# EAGLE board TinkerCAD Design-D4 (EAGLE 9.7.0)

Size 296.07 x 301.46 mm. Coordinates in mm from the lower left corner, seen from the top.
Outline: 0,0 296.07,0 296.07,301.46 0,301.46 0,0
Copper layers (1*16): Top 0.035mm / dielectric 1.5mm / Bottom 0.035mm
Design rules "default": minimum track width 6mil, minimum drill 0.35mm, track to track 6mil, track to pad 6mil, pad to pad 6mil, via to via 6mil, smd to smd 6mil, copper to edge 40mil, drill to drill 6mil, minimum pad ring 10mil, minimum via ring 8mil, stop-mask expansion 4mil, vias tented up to drill 0mil, thermal gap 10mil

## Footprints (pad centres in the part's own frame; a part is rotated, then mirrored left to right if it is on the bottom)
HC-SR04 = drill 1.016 long: 1 -3.81,0; 2 -1.27,0; 3 1.27,0; 4 3.81,0
DG01D = drill 1.118 pad 3.15 octagon: + 2.54,0; - -2.54,0
BATTERY-GENERIC = drill 1.118 pad 3.15 octagon: + 2.54,0; - -2.54,0
TSOP48 = drill 0.8: 1 -2.54,0; 2 0,0; 3 2.54,0
DIP762W53P254L1969H508Q16B = drill 0.743 pad 1.343: 1 -3.81,8.89; 2 -3.81,6.35; 3 -3.81,3.81; 4 -3.81,1.27; 5 -3.81,-1.27; 6 -3.81,-3.81; 7 -3.81,-6.35; 8 -3.81,-8.89; 9 3.81,-8.89; 10 3.81,-6.35; 11 3.81,-3.81; 12 3.81,-1.27; 13 3.81,1.27; 14 3.81,3.81; 15 3.81,6.35; 16 3.81,8.89
ARDUINO-UNO-R3-SHIELD = drill 1.016 pad 1.88: 3.3V 24.13,-2.54; 5V 24.13,0; A0 24.13,12.7; A1 24.13,15.24; A2 24.13,17.78; A3 24.13,20.32; A4 24.13,22.86; A5 24.13,25.4; AREF -24.13,-13.97; D2 -24.13,20.32; D3 -24.13,17.78; D4 -24.13,15.24; D5 -24.13,12.7; D6 -24.13,10.16; D7 -24.13,7.62; D8 -24.13,3.81; D9 -24.13,1.27; D10 -24.13,-1.27; D11 -24.13,-3.81; D12 -24.13,-6.35; D13 -24.13,-8.89; GND@0 24.13,2.54; GND@1 24.13,5.08; GND@2 -24.13,-11.43; IOREF 24.13,-7.62; NC 24.13,-10.16; RES 24.13,-5.08; RX -24.13,25.4; SCL -24.13,-19.05; SDA -24.13,-16.51; TX -24.13,22.86; VIN 24.13,7.62

## Placement (x,y rotation side)
DIST1  DISTANCE-SENSOR-4PINHC-SR04  [HC-SR04]  26.04,119.14 0 top
DIST2  DISTANCE-SENSOR-4PINHC-SR04  [HC-SR04]  215.89,80.94 0 top
M1  MOTOR_DG01D  [DG01D]  162.03,227.17 180 top
M2  MOTOR_DG01D  [DG01D]  283.37,176.49 180 top
P12V_BATTERY_SIMULATOR  BATTERYGENERIC  [BATTERY-GENERIC]  162.04,95.93 180 top
U1  IR-RECEIVERTSOP48  [TSOP48]  75.84,81.31 0 top
U2  IR-RECEIVERTSOP48  [TSOP48]  92.15,76.35 0 top
U3  L293E  [DIP762W53P254L1969H508Q16B]  127.5,178.49 90 top
U4  ARDUINO-UNO-R3-SHIELD  [ARDUINO-UNO-R3-SHIELD]  118.32,29.84 270 top

## Library data of the parts
DIST1 DIST2 M1 M2 P12V_BATTERY_SIMULATOR U1-U4 = Tinkercad

## Nets
M1_+: M1.+ U3.6
M1_-: M1.- U3.3
M2_+: M2.+ U3.14
M2_-: M2.- U3.11
P12V_BATTERY_SIMULATOR+: P12V_BATTERY_SIMULATOR.+ U3.8
P12V_BATTERY_SIMULATOR-: DIST1.1 DIST1.4 DIST2.1 DIST2.4 P12V_BATTERY_SIMULATOR.- U1.1 U1.3 U2.1 U2.3 U3.4 U3.5 U3.12 U3.13 U3.16 U4.5V U4.GND@0 U4.GND@1 U4.GND@2
U4_A0: DIST2.2 U4.A0
U4_A1: DIST2.3 U4.A1
U4_D2: U3.15 U4.D2
U4_D4: U3.10 U4.D4
U4_D5: U3.1 U4.D5
U4_D6: U3.9 U4.D6
U4_D7: U3.2 U4.D7
U4_D8: U3.7 U4.D8
U4_D9: DIST1.2 U4.D9
U4_D10: DIST1.3 U4.D10
U4_D11: U2.2 U4.D11
U4_D12: U1.2 U4.D12

## Tracks (layer width: path | path; a pad name or v marks a point on that pad's centre or on a via)
M1_+  (1 unrouted)
M1_-  (1 unrouted)
M2_+  (1 unrouted)
M2_-  (1 unrouted)
P12V_BATTERY_SIMULATOR+  (1 unrouted)
P12V_BATTERY_SIMULATOR-  (17 unrouted)
U4_A0  (1 unrouted)
U4_A1  (1 unrouted)
U4_D2  (1 unrouted)
U4_D4  (1 unrouted)
U4_D5  (1 unrouted)
U4_D6  (1 unrouted)
U4_D7  (1 unrouted)
U4_D8  (1 unrouted)
U4_D9  (1 unrouted)
U4_D10  (1 unrouted)
U4_D11  (1 unrouted)
U4_D12  (1 unrouted)